# EAGLE board openstepper (EAGLE 7.1.0)
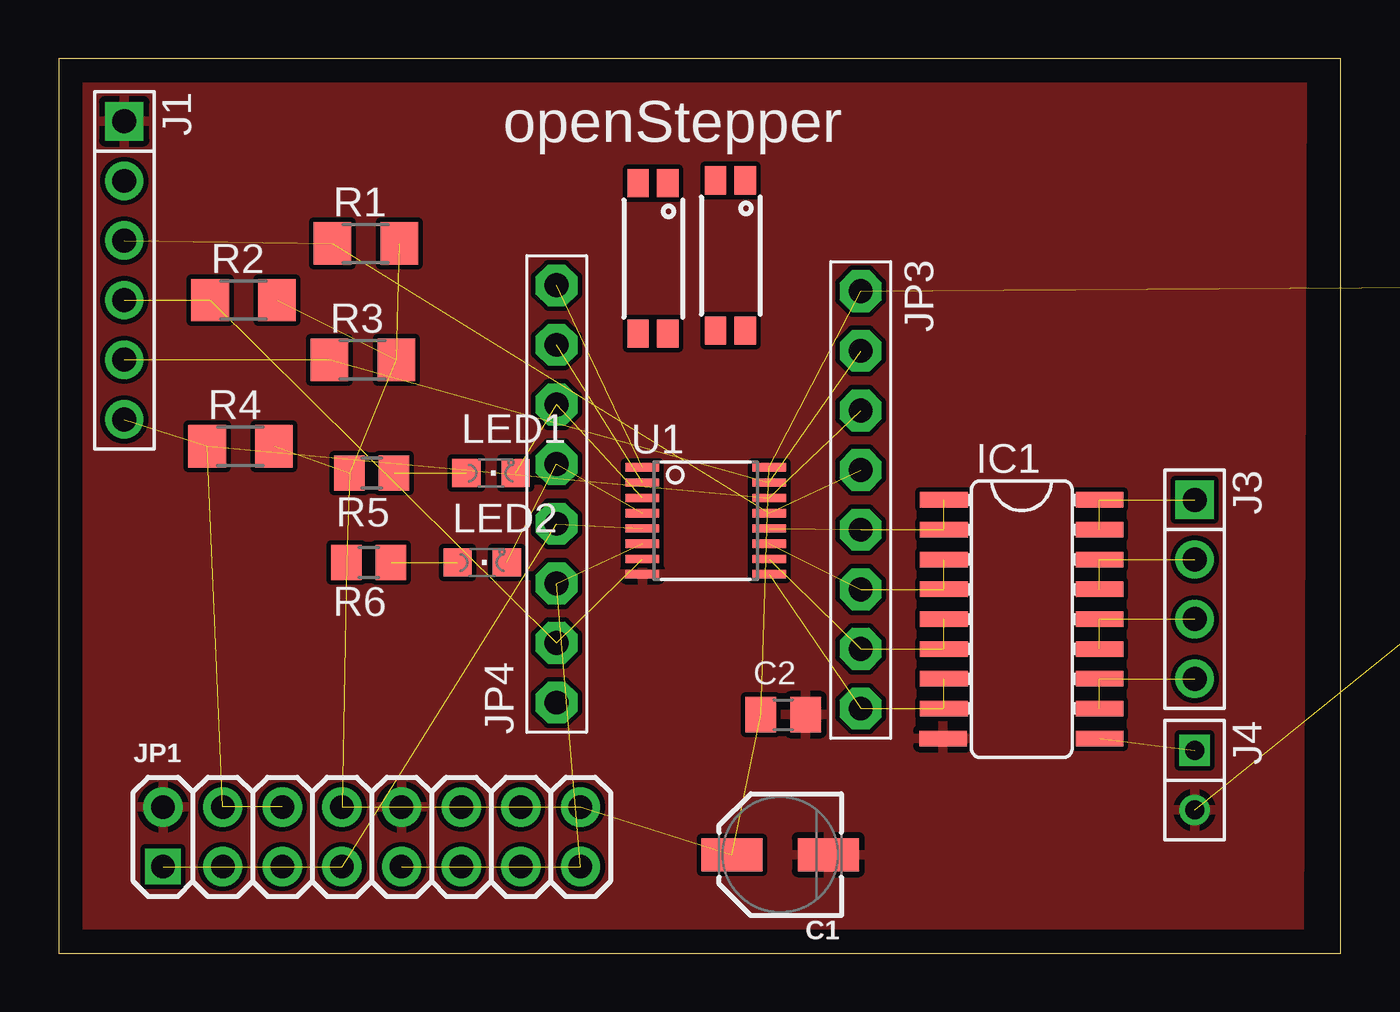
[diagram p0: board, top side]

Size 54.61 x 38.1 mm. Coordinates in mm from the lower left corner, seen from the top.
Outline: 0,0 54.61,0 54.61,38.1 0,38.1 0,0
Copper layers (1*16): Top 0.035mm / dielectric 1.5mm / Bottom 0.035mm
Design rules "default": minimum track width 10mil, minimum drill 0.6mm, track to track 8mil, track to pad 8mil, pad to pad 8mil, via to via 8mil, smd to smd 8mil, copper to edge 40mil, drill to drill 8mil, minimum pad ring 10mil, minimum via ring 8mil, stop-mask expansion 4mil, vias tented up to drill 0mil, thermal gap 10mil

## Footprints (pad centres in the part's own frame; a part is rotated, then mirrored left to right if it is on the bottom)
PANASONIC_C = smd 2.6 x 1.4: + 2.05,0; - -2.05,0
C805 = smd 1.3 x 1.5: 1 -0.95,0; 2 0.95,0
C025-024X044 = drill 0.813 octagon: 1 -1.27,0; 2 1.27,0
SO-18 = smd 0.66 x 2.032: 1 -5.08,-3.315; 2 -3.81,-3.315; 3 -2.54,-3.315; 4 -1.27,-3.315; 5 0,-3.315; 6 1.27,-3.315; 7 2.54,-3.315; 8 3.81,-3.315; 9 5.08,-3.353; 10 5.08,3.315; 11 3.81,3.315; 12 2.54,3.315; 13 1.27,3.315; 14 0,3.315; 15 -1.27,3.315; 16 -2.54,3.315; 17 -3.81,3.315; 18 -5.08,3.315
TO252 = smd 1 x 1.6: 1 -2.28,-4.8; 2 2.28,-4.8 | smd 5.4 x 6.2: 3 0,2.5
M1X6 = drill 1.02 pad 1.632 square: 1 0,0 | drill 1.02 pad 1.632: 2 2.54,0; 3 5.08,0; 4 7.62,0; 5 10.16,0; 6 12.7,0
M1X4 = drill 1.02 pad 1.632 square: 1 0,0 | drill 1.02 pad 1.632: 2 2.54,0; 3 5.08,0; 4 7.62,0
M1X2 = drill 0.8 square: 1 -1.27,0 | drill 0.8: 2 1.27,0
2X08 = drill 1 square: 1 -8.89,-1.27 | drill 1 pad 1.676: 2 -8.89,1.27; 3 -6.35,-1.27; 4 -6.35,1.27; 5 -3.81,-1.27; 6 -3.81,1.27; 7 -1.27,-1.27; 8 -1.27,1.27; 9 1.27,-1.27; 10 1.27,1.27; 11 3.81,-1.27; 12 3.81,1.27; 13 6.35,-1.27; 14 6.35,1.27; 15 8.89,-1.27; 16 8.89,1.27
1X08-BIG = drill 1.016 pad 1.778 octagon: 1 -8.89,0; 2 -6.35,0; 3 -3.81,0; 4 -1.27,0; 5 1.27,0; 6 3.81,0; 7 6.35,0; 8 8.89,0
LED-805 = smd 1.2 x 1.2: A 0,-1.05; C 0,1.05
R1206 = smd 1.6 x 1.803: 1 -1.422,0; 2 1.422,0
R805 = smd 1.3 x 1.5: 1 -0.95,0; 2 0.95,0
TSSOP-16 = smd 0.35 x 1.43: 1 -2.275,-2.7; 2 -1.625,-2.7; 3 -0.975,-2.7; 4 -0.325,-2.7; 5 0.325,-2.7; 6 0.975,-2.7; 7 1.625,-2.7; 8 2.275,-2.7; 9 2.275,2.7; 10 1.625,2.7; 11 0.975,2.7; 12 0.325,2.7; 13 -0.325,2.7; 14 -0.975,2.7; 15 -1.625,2.7; 16 -2.275,2.7
SSOP-4 = smd 1.2 x 0.9: 1 -3.2,0.67; 2 -3.2,-0.6; 3 3.2,-0.6; 4 3.2,0.67

## Placement (x,y rotation side)
C1  4.7uF  [PANASONIC_C]  30.73,4.19 180 top
C2  0.01uF  [C805]  30.86,10.16 0 top
C3  330nF  [C025-024X044]  66.93,22.1 180 top  (outside the outline)
C4  100nF  [C025-024X044]  69.47,28.45 0 top  (outside the outline)
IC1  DARLINGTON_ARRAY  [SO-18]  41.02,14.22 270 top
IC2  7805DT  [TO252]  68.45,36.96 0 top  (outside the outline)
J1  CON_HEADER_1X06-PTH  [M1X6]  2.79,35.43 270 top
J3  CON_HEADER_1X04  [M1X4]  48.39,19.3 270 top
J4  CON_HEADER_1X02-PTH  [M1X2]  48.39,7.37 270 top
JP1  [2X08]  13.34,4.95 0 top
JP3  [1X08-BIG]  34.16,19.3 270 top
JP4  [1X08-BIG]  21.21,19.56 90 top
LED1  [LED-805]  18.41,20.45 270 top
LED2  [LED-805]  18.03,16.64 270 top
LED3  [LED-805]  74.8,26.54 180 top  (outside the outline)
R1  10k  [R1206]  13.08,30.23 0 top
R2  10k  [R1206]  7.87,27.81 0 top
R3  1k6  [R1206]  12.95,25.27 0 top
R4  1k6  [R1206]  7.75,21.59 0 top
R5  [R805]  13.34,20.45 180 top
R6  [R805]  13.21,16.64 180 top
R8  1k5  [R1206]  74.8,30.73 90 top  (outside the outline)
U1  IC_PCA9629A  [TSSOP-16]  27.56,18.41 270 top
U$7  TCMT1103-OPTO  [SSOP-4]  25.27,29.59 270 top
U$8  TCMT1103-OPTO  [SSOP-4]  28.57,29.72 270 top

## Library data of the parts
C1 JP1 = microbuilder
C2 J1 J3 J4 LED1-LED3 R1-R6 R8 = dp_devices
C3 C4 = rcl
IC1 U1 = openstepper
IC2 JP3 JP4 = adafruit
U$7 U$8 = SparkFun-DiscreteSemi

## Nets
+12V: IC1.10 J4.1
AD0: JP1.1 JP1.3 JP1.5 JP1.7 JP4.4 U1.5
AD1: JP1.9 JP1.11 JP1.13 JP1.15 JP4.3 U1.6
GND: C1.- C2.2 C3.1 C4.1 IC1.9 IC2.3 J1.1 J4.2 JP1.2 JP1.10 LED3.C U1.8
INT: J1.3 JP3.4 R1.1 U1.13
N$1: LED3.A R8.1
N$6: IC1.17 IC1.18 J3.1
N$8: IC1.15 IC1.16 J3.2
N$9: IC1.13 IC1.14 J3.3
N$10: IC1.11 IC1.12 J3.4
N$11: LED1.A R5.1
N$15: LED2.A R6.1
OUT0: IC1.1 IC1.2 JP3.5 U1.12
OUT1: IC1.3 IC1.4 JP3.6 U1.11
OUT2: IC1.5 IC1.6 JP3.7 U1.10
OUT3: IC1.7 IC1.8 JP3.8 U1.9
P0/DET: JP4.8 U1.1
P1: JP4.7 U1.2
P2: JP4.6 LED1.C U1.3
P3: JP4.5 LED2.C U1.4
RESET: J1.4 JP4.2 R2.1 U1.7
SCL: J1.6 JP1.4 JP1.6 JP3.3 R4.1 U1.14
SDA: J1.5 JP3.2 R3.1 U1.15
V_MOT: C3.2 IC2.1
VDD: C1.+ C2.1 C4.2 IC2.2 JP1.8 JP1.16 JP3.1 R1.2 R2.2 R3.2 R4.2 R5.2 R6.2 R8.2 U1.16
VSS: JP4.1

## Tracks (layer width: path | path; a pad name or v marks a point on that pad's centre or on a via)
+12V  (1 unrouted)
AD0  (5 unrouted)
AD1  (5 unrouted)
GND  (4 unrouted)
  pour Top: 0.25,37.97 52.96,37.59 52.83,0.38 -0.25,0.13
INT  (3 unrouted)
N$1  (1 unrouted)
N$6  (2 unrouted)
N$8  (2 unrouted)
N$9  (2 unrouted)
N$10  (2 unrouted)
N$11  (1 unrouted)
N$15  (1 unrouted)
OUT0  (3 unrouted)
OUT1  (3 unrouted)
OUT2  (3 unrouted)
OUT3  (3 unrouted)
P0/DET  (1 unrouted)
P1  (1 unrouted)
P2  (2 unrouted)
P3  (2 unrouted)
RESET  (3 unrouted)
SCL  (5 unrouted)
SDA  (3 unrouted)
V_MOT  (1 unrouted)
VDD  (14 unrouted)

## Text on the board
tPlace: openStepper